# Altium PCB InterruptorPIR.PcbDoc
Units mm, origin at the board's own origin, x right, y up, seen from the top; angles counter-clockwise.
Board outline 44.45 x 40 mm, 2 copper layers (Top Layer, Bottom Layer); 15 components, 11 nets, 32 pads, 0 vias.
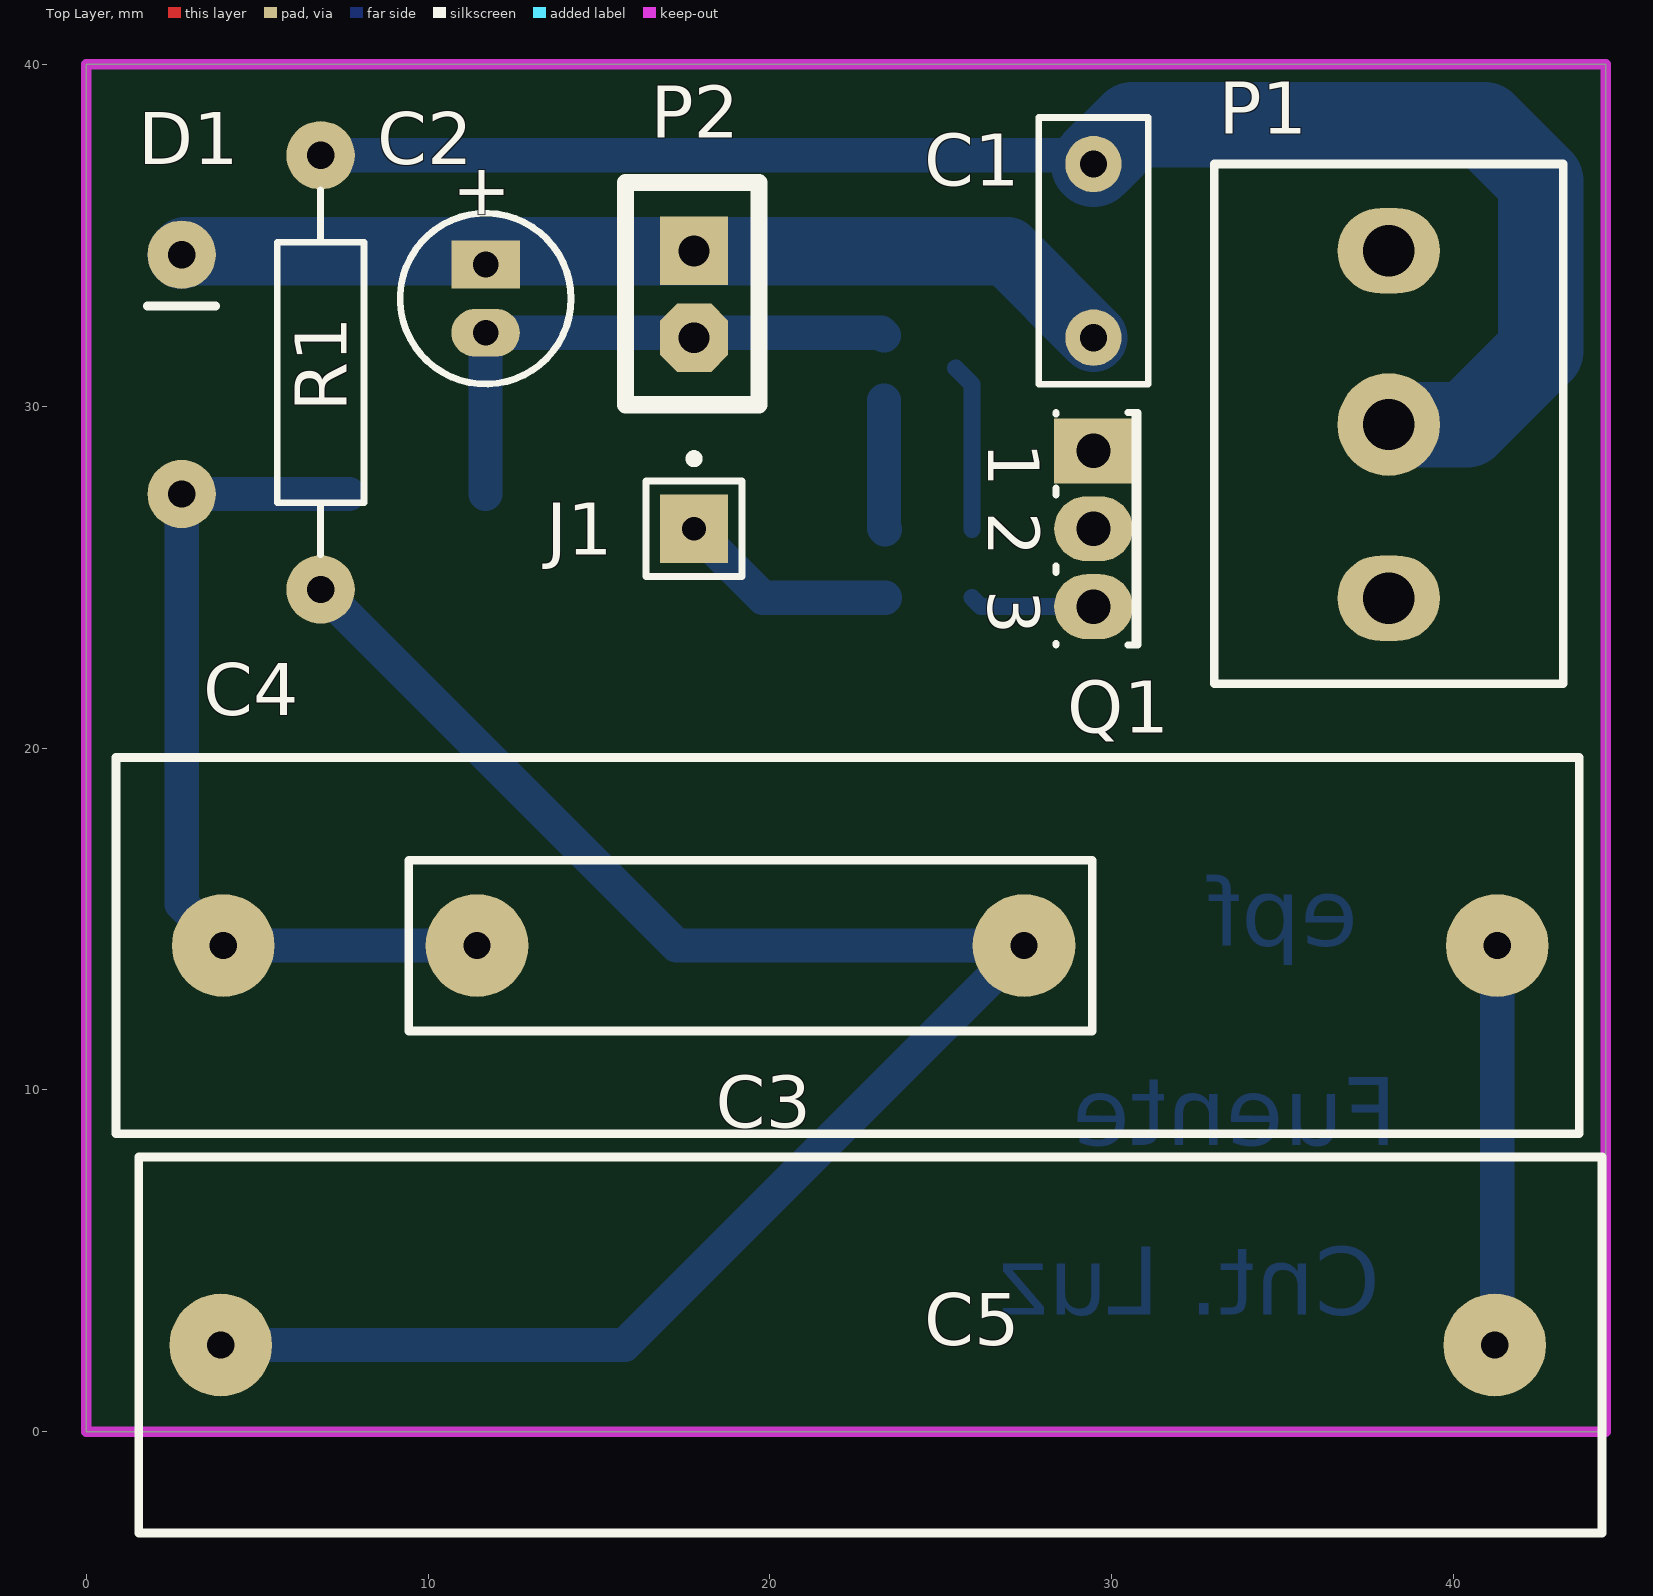
[diagram p0: Top Layer view]
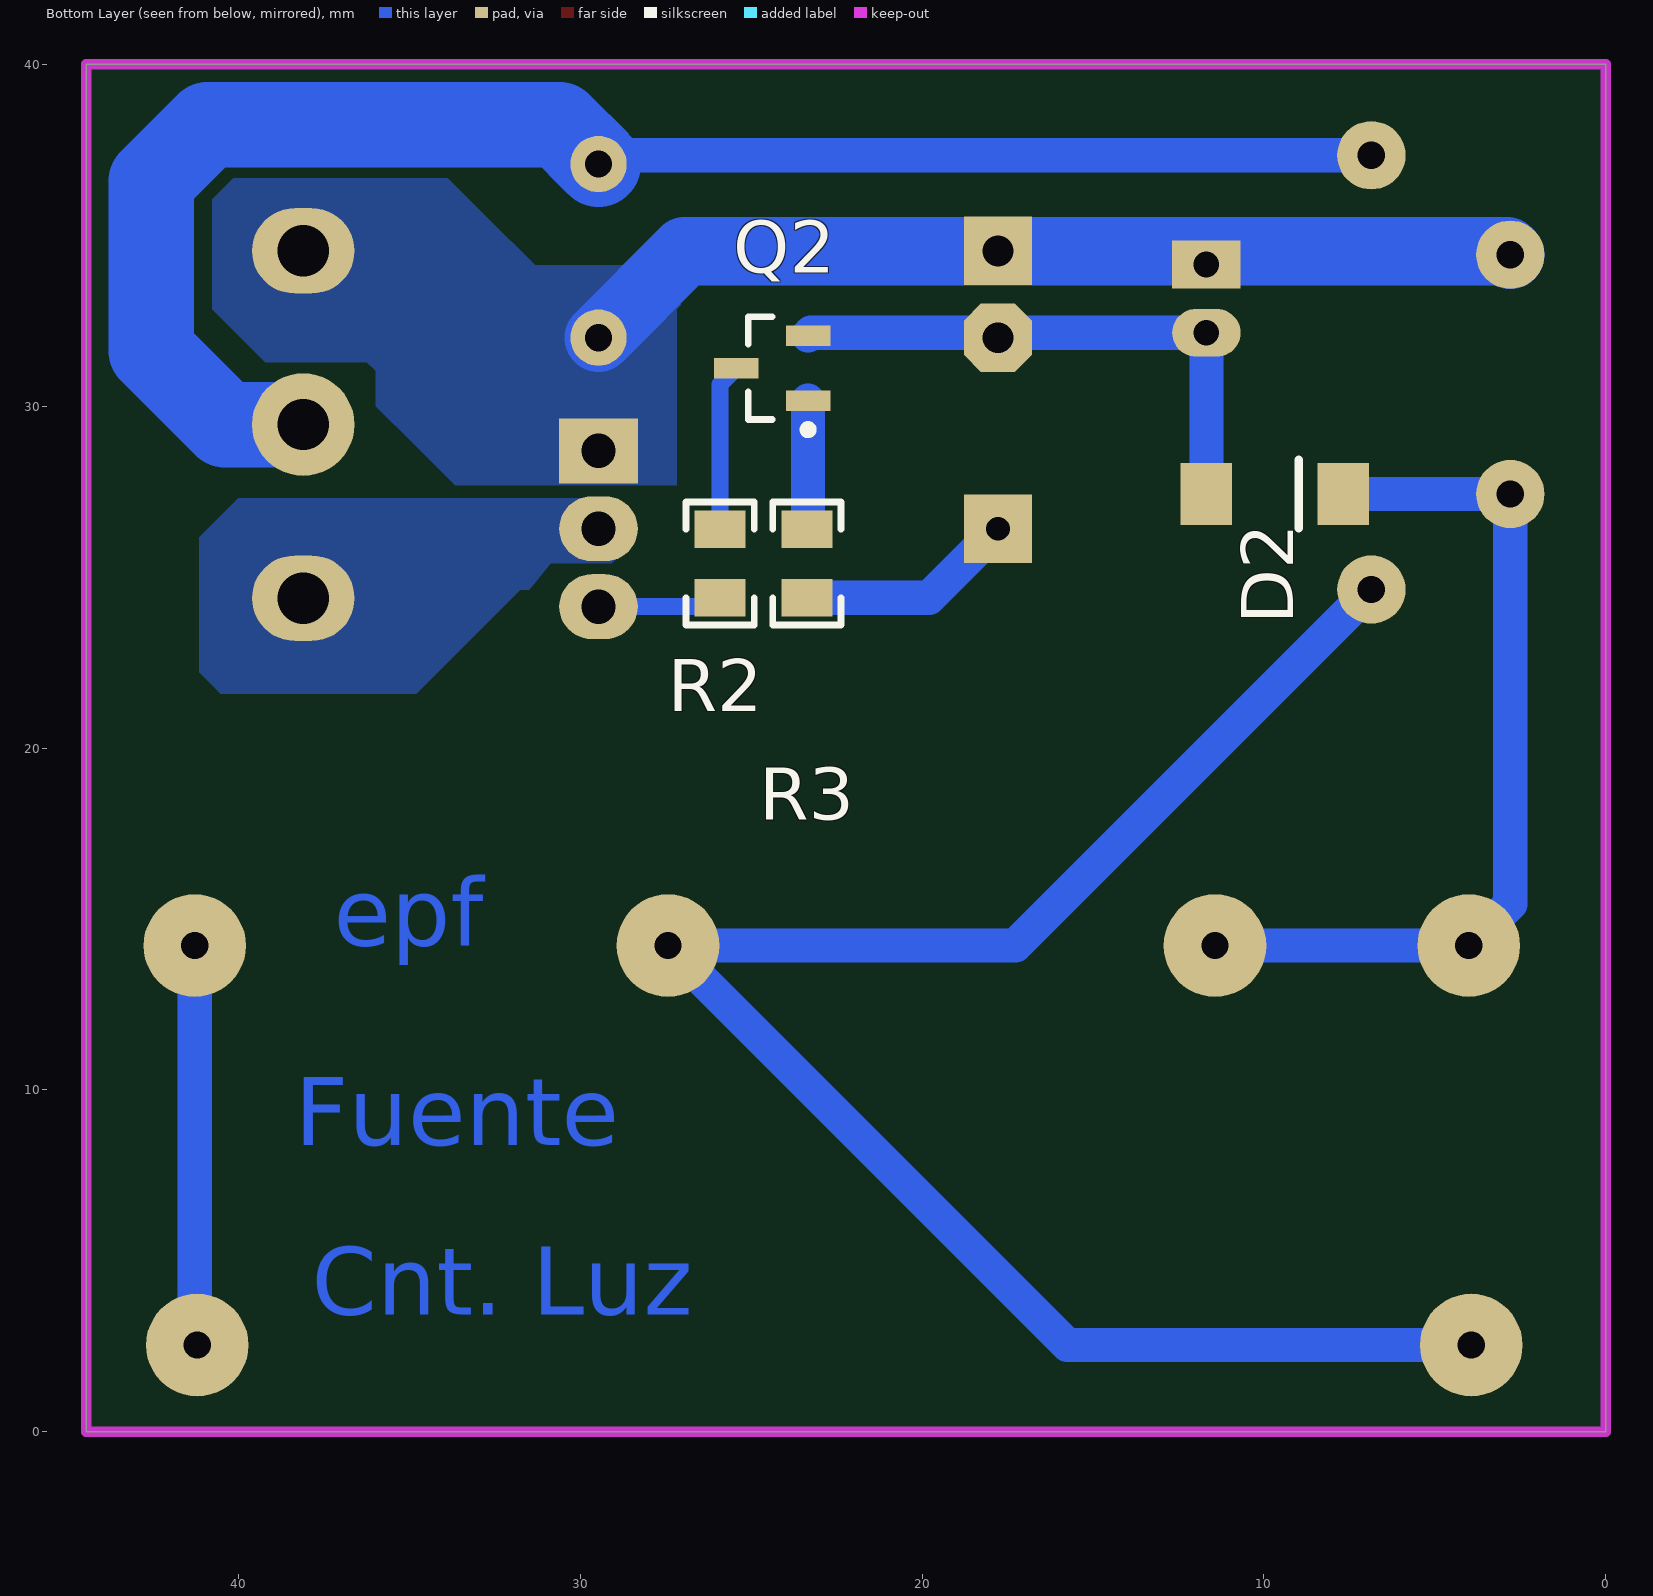
[diagram p1: Bottom Layer view, seen from below]

## Layer stack, top to bottom
Top Layer: signal copper 0.0356
Dielectric: dielectric 0.32, FR-4, Dk 4.8
Bottom Layer: signal copper 0.0356

## Board outline
0,0 0,40.005 44.45,40.005 44.45,0

## Design rules (kind name [scope] priority, off if disabled: settings)
Clearance [All] p1: gap=0.3
PolygonConnect [All] p1: connectstyle=Direct reliefconductorwidth=0.254 reliefentries=4 polygonreliefangle="90 Angle"
RoomDefinition FuenteAlimentacion [InComponentClass('FuenteAlimentacion')] p1: confinementstyle=ConfineIn formatcopy=TRUE lockcomponents=FALSE outline -1.27,-4.953 49.276,-4.953 49.276,41.148 -1.27,41.148
RoutingVias [All] p1: holewidth=0.6 width=1 viastyle="Through Hole" minholewidth=0.5 minwidth=1.27 maxholewidth=1 maxwidth=3
SilkscreenOverComponentPads [All] p1: minsilkscreentomaskgap=0.254
SolderMaskExpansion [All] p1: expansion=0.102
Width [All] p1: maxlimit=3 minlimit=0.2 preferedwidth=2
27 further rules are at their usual default settings.

## Components (designator, comment, footprint, x,y, rotation, side; value= is the part's Value field where it differs from the comment)
C1 "Cap" CAPR5.08-7.8x3.2 29.464,34.544 r270 top
C2 "Cap Pol1" CAPPR2-5x6.8 11.684,33.147 r270 top
C3 "Cap" CAP400V 27.432,14.224 r180 top
C4 "Cap" CAP250V 41.275,14.224 r180 top
C5 "Cap" CAP250V 3.937,2.54 r0 top
D1 "D Zener" Zener 2.794,27.432 r90 top
D2 "Diode 1N4148" 1N4148SMD 11.684,27.432 r180 bottom
J1 "Socket" PIN1 17.78,26.416 r0 top
P1 "RegletaPCB" RegletaPCBx3 38.1,34.544 r270 top
P2 "Header2" Header2Macho 17.78,34.544 r270 top
Q1 "Triac" SFM-T3/A2.4V 29.464,26.416 r270 top
Q2 "BC847B" SOT23_N 24.384,31.115 r0 bottom
R1 "Res Semi" AXIAL-0.5 6.858,30.988 r270 top
R2 "Resistor" 0805_RES 25.908,25.4 r90 bottom
R3 "Resistor" 0805_RES 23.368,25.4 r270 bottom

## Footprints (in the part's own frame and the unit in brackets; to place one, negate y for a bottom-side part, rotate by r counter-clockwise, add the part's x,y. Pads: shape width x height; smd on the part's side, far side on the other; paste and mask are expansions set on the pad)
1N4148SMD [mm]
  rect 1.5x1.8 smd: 1(0,0) 2(4,0)
  silkscreen extent 2.7,-1 2.7,1
0805_RES [mm]
  rect 1.1x1.5 smd: 1(-1,0) 2(1,0)
  silkscreen extent -1.8,-1 1.8,1, body extent -1,-0.62 1,0.63, height 0.78
AXIAL-0.5 [mm] "Axial Device, Thru-Hole; 2 Leads; 0.5 in Pin Spacing"
  round 2 hole 0.8: 1(-6.35,0) 2(6.35,0)
  silkscreen extent -5.33,-1.27 5.33,1.27
CAP250V [mm]
  round 3 hole 0.8: 1(0,0) 2(37.265,0)
  silkscreen extent -2.4,-5.5 40.4,5.5
CAP400V [mm]
  round 3 hole 0.8: 1(0,0) 2(16,0)
  silkscreen extent -2,-2.5 18,2.5
CAPPR2-5x6.8 [mm] "Capacitor, Electrolytic, Radial; Body 5 x 6.8 mm (Dia.xH typ); Pin Spacing 2 mm (typ)"
  rect 1.4x2 hole 0.75: 1(-1,0)
  oval 1.4x2 hole 0.75: 2(1,0)
  silkscreen extent -2.5,-2.5 2.5,2.5
CAPR5.08-7.8x3.2 [mm] "Capacitor, Ceramic, Thru-Hole, Dipped Radial; Body 7.8 x 3.2 mm (WxT) Pin Spacing 5.08 mm (typ)"
  round 1.65 hole 0.8: 1(-2.54,0) 2(2.54,0)
  silkscreen extent -3.9,-1.6 3.9,1.6
Header2Macho [mm]
  rect 2x2 hole 0.9: 1(0,0)
  oct 2x2 hole 0.9: 2(2.54,0)
  silkscreen extent -2,-2 4.5,1.9, body extent -1.18,-1.21 3.82,1.29, height 8.2
PIN1 [mm] "Connector; Plug"
  rect 2x2 hole 0.7: 1(0,0)
  silkscreen extent -1.4,-1.4 1.4,2.17
RegletaPCBx3 [mm]
  oval 2.5x3 hole 1.5: 1(0,0) 3(10.16,0)
  round 3 hole 1.5: 2(5.08,0)
  silkscreen extent -2.54,-5.1 12.66,5.1
SFM-T3/A2.4V [mm] "TO, Thru-Hole, Vertical, Heatsink Mounted; 3 In-Line Leads; Pitch 2.28 mm"
  rect 1.9x2.3 hole 1: 1(-2.28,0)
  oval 1.9x2.3 hole 1: 2(0,0) 3(2.28,0)
  silkscreen extent -3.4,-1.1 3.4,1.3
SOT23_N [mm] "SOT23, 3-Leads, Body 2.9x1.3mm, Pitch 0.95mm, Lead Span 2.3mm, IPC Medium Density"
  rect 1.3x0.6 smd: 1(-1.05,0.95) 2(-1.05,-0.95) 3(1.05,0)
  silkscreen extent -1.17,-1.5 0.7,1.92, body extent -0.7,-1.5 0.7,1.5, height 1.1
Zener [mm]
  round 2 hole 0.8: 1(0,0) 2(7,0)
  silkscreen extent 5.5,-1 5.5,1

## Part data
C1 C3 C4 C5: "Capacitor"
C2: "Polarized Capacitor (Radial)"
D1: "Zener Diode"
D2: "High Conductance Fast Diode"
P1: library part RegletaPCBx3
Q1: "Silicon Bidirectional Triode Thyristor"
Q2: "NPN General-purpose Transistor"
R1: "Semiconductor Resistor"
R2 R3: library part Res

## Nets (pads, with @x,y where several pads share a name; then routed paths per layer and width w, separated by ;. In a path a pad name is that pad's centre, name@x,y a point inside that pad or via, vN(x,y) a via of type N, cw(c..) or ccw(c..) an arc to the next point about the centre after c; other vN are vias at no path point)
CARGAL: P1.3 Q1.2
GND: C2.2 D2.1 P2.2 Q2.2 | length 16.4
  Bottom Layer w1: D2.1 C2.2 23.252,32.147 Q2.2
L: C1.2 C2.1 D1.2 P1.1 P2.1 Q1.1 | length 27.8
  Bottom Layer w2: D1.2 2.89,34.528 26.94,34.528 C1.2
N: C1.1 P1.2 R1.1 | length 47.2
  Bottom Layer w1: R1.1 29.21,37.338 C1.1
  Bottom Layer w2.5: C1.1 30.607,38.227 40.894,38.227 42.545,36.576 42.545,31.623 40.386,29.464 P1.2
NetC3_1: C3.1 C5.1 R1.2 | length 53.2
  Bottom Layer w1: C5.1 15.748,2.54 C3.1 17.272,14.224 R1.2
NetC3_2: C3.2 C4.2 D1.1 D2.2 | length 26
  Bottom Layer w1: D2.2 D1.1 2.794,15.44 C4.2 C3.2
NetC4_1: C4.1 C5.2 | length 11.7
  Bottom Layer w1: C5.2 41.275,2.613 C4.1
NetJ1_1: J1.1 R3.2 | length 6.4
  Bottom Layer w1: J1.1 19.796,24.4 R3.2
NetQ1_3: Q1.3 R2.1 | length 3.7
  Bottom Layer w0.5: R2.1 26.172,24.136 Q1.3
NetQ2_1: Q2.1 R3.1 | length 3.8
  Bottom Layer w1: Q2.1 23.334,26.434 R3.1
NetQ2_3: Q2.3 R2.2 | length 4.9
  Bottom Layer w0.5: Q2.3 25.908,30.641 R2.2

## Polygon pours and split planes (outlines as drawn)
L on Bottom Layer "MT1" (solid, pour order 1001): 27.051,32.966 27.18,32.838 27.18,27.686 33.65,27.686 34.815,28.845 35.979,30.004 35.979,31.035 36.238,31.292 38.308,31.292 39.214,31.292 40.12,32.194 40.767,32.838 40.767,34.898 40.767,36.057 40.249,36.572 39.991,36.83 37.015,36.83 34.038,36.83 32.744,35.542 31.321,34.125 27.957,34.125
CARGAL on Bottom Layer "MT2" (solid, pour order 1000): 30.861,25.4 29.083,25.4 28.575,25.908 28.575,26.797 29.083,27.305 29.337,27.305 30.48,27.305 39.497,27.305 40.005,27.305 40.64,26.67 41.148,26.162 41.148,22.225 40.513,21.59 39.37,21.59 34.798,21.59 34.163,22.225 31.75,24.638 31.496,24.638

## Keep-outs
Keep-Out Layer:
  the board outline again, w0.3

## Other copper
Bottom Layer:
  text "epf" at 37.211,14.224 h2
  text "Fuente" at 38.354,8.382 h2
  text "Cnt. Luz" at 37.846,3.429 h2

## Dimensions
0,0 to 0,40.005 on Mechanical 1
0,0 to 44.45,0 on Mechanical 1

## Text inside footprints (layer, text, board x,y; h text height)
C2: Top Overlay "+" at 10.934,37.122 h1.5 r270
Q1: Top Overlay "1" at 26.389,28.946 h1.5 r270; Top Overlay "2" at 26.389,26.916 h1.5 r270; Top Overlay "3" at 26.389,24.636 h1.5 r270